# Altium PCB PCB_ECU_Standelone-V1.0_2024-03-04.pcbdoc (part 2 of 2)
Units mm, origin at the board's own origin, x right, y up, seen from the top; angles counter-clockwise.
Board outline 181.85 x 171.52 mm, 2 copper layers (Top Layer, Bottom Layer); 165 components, 147 nets, 580 pads, 706 vias.
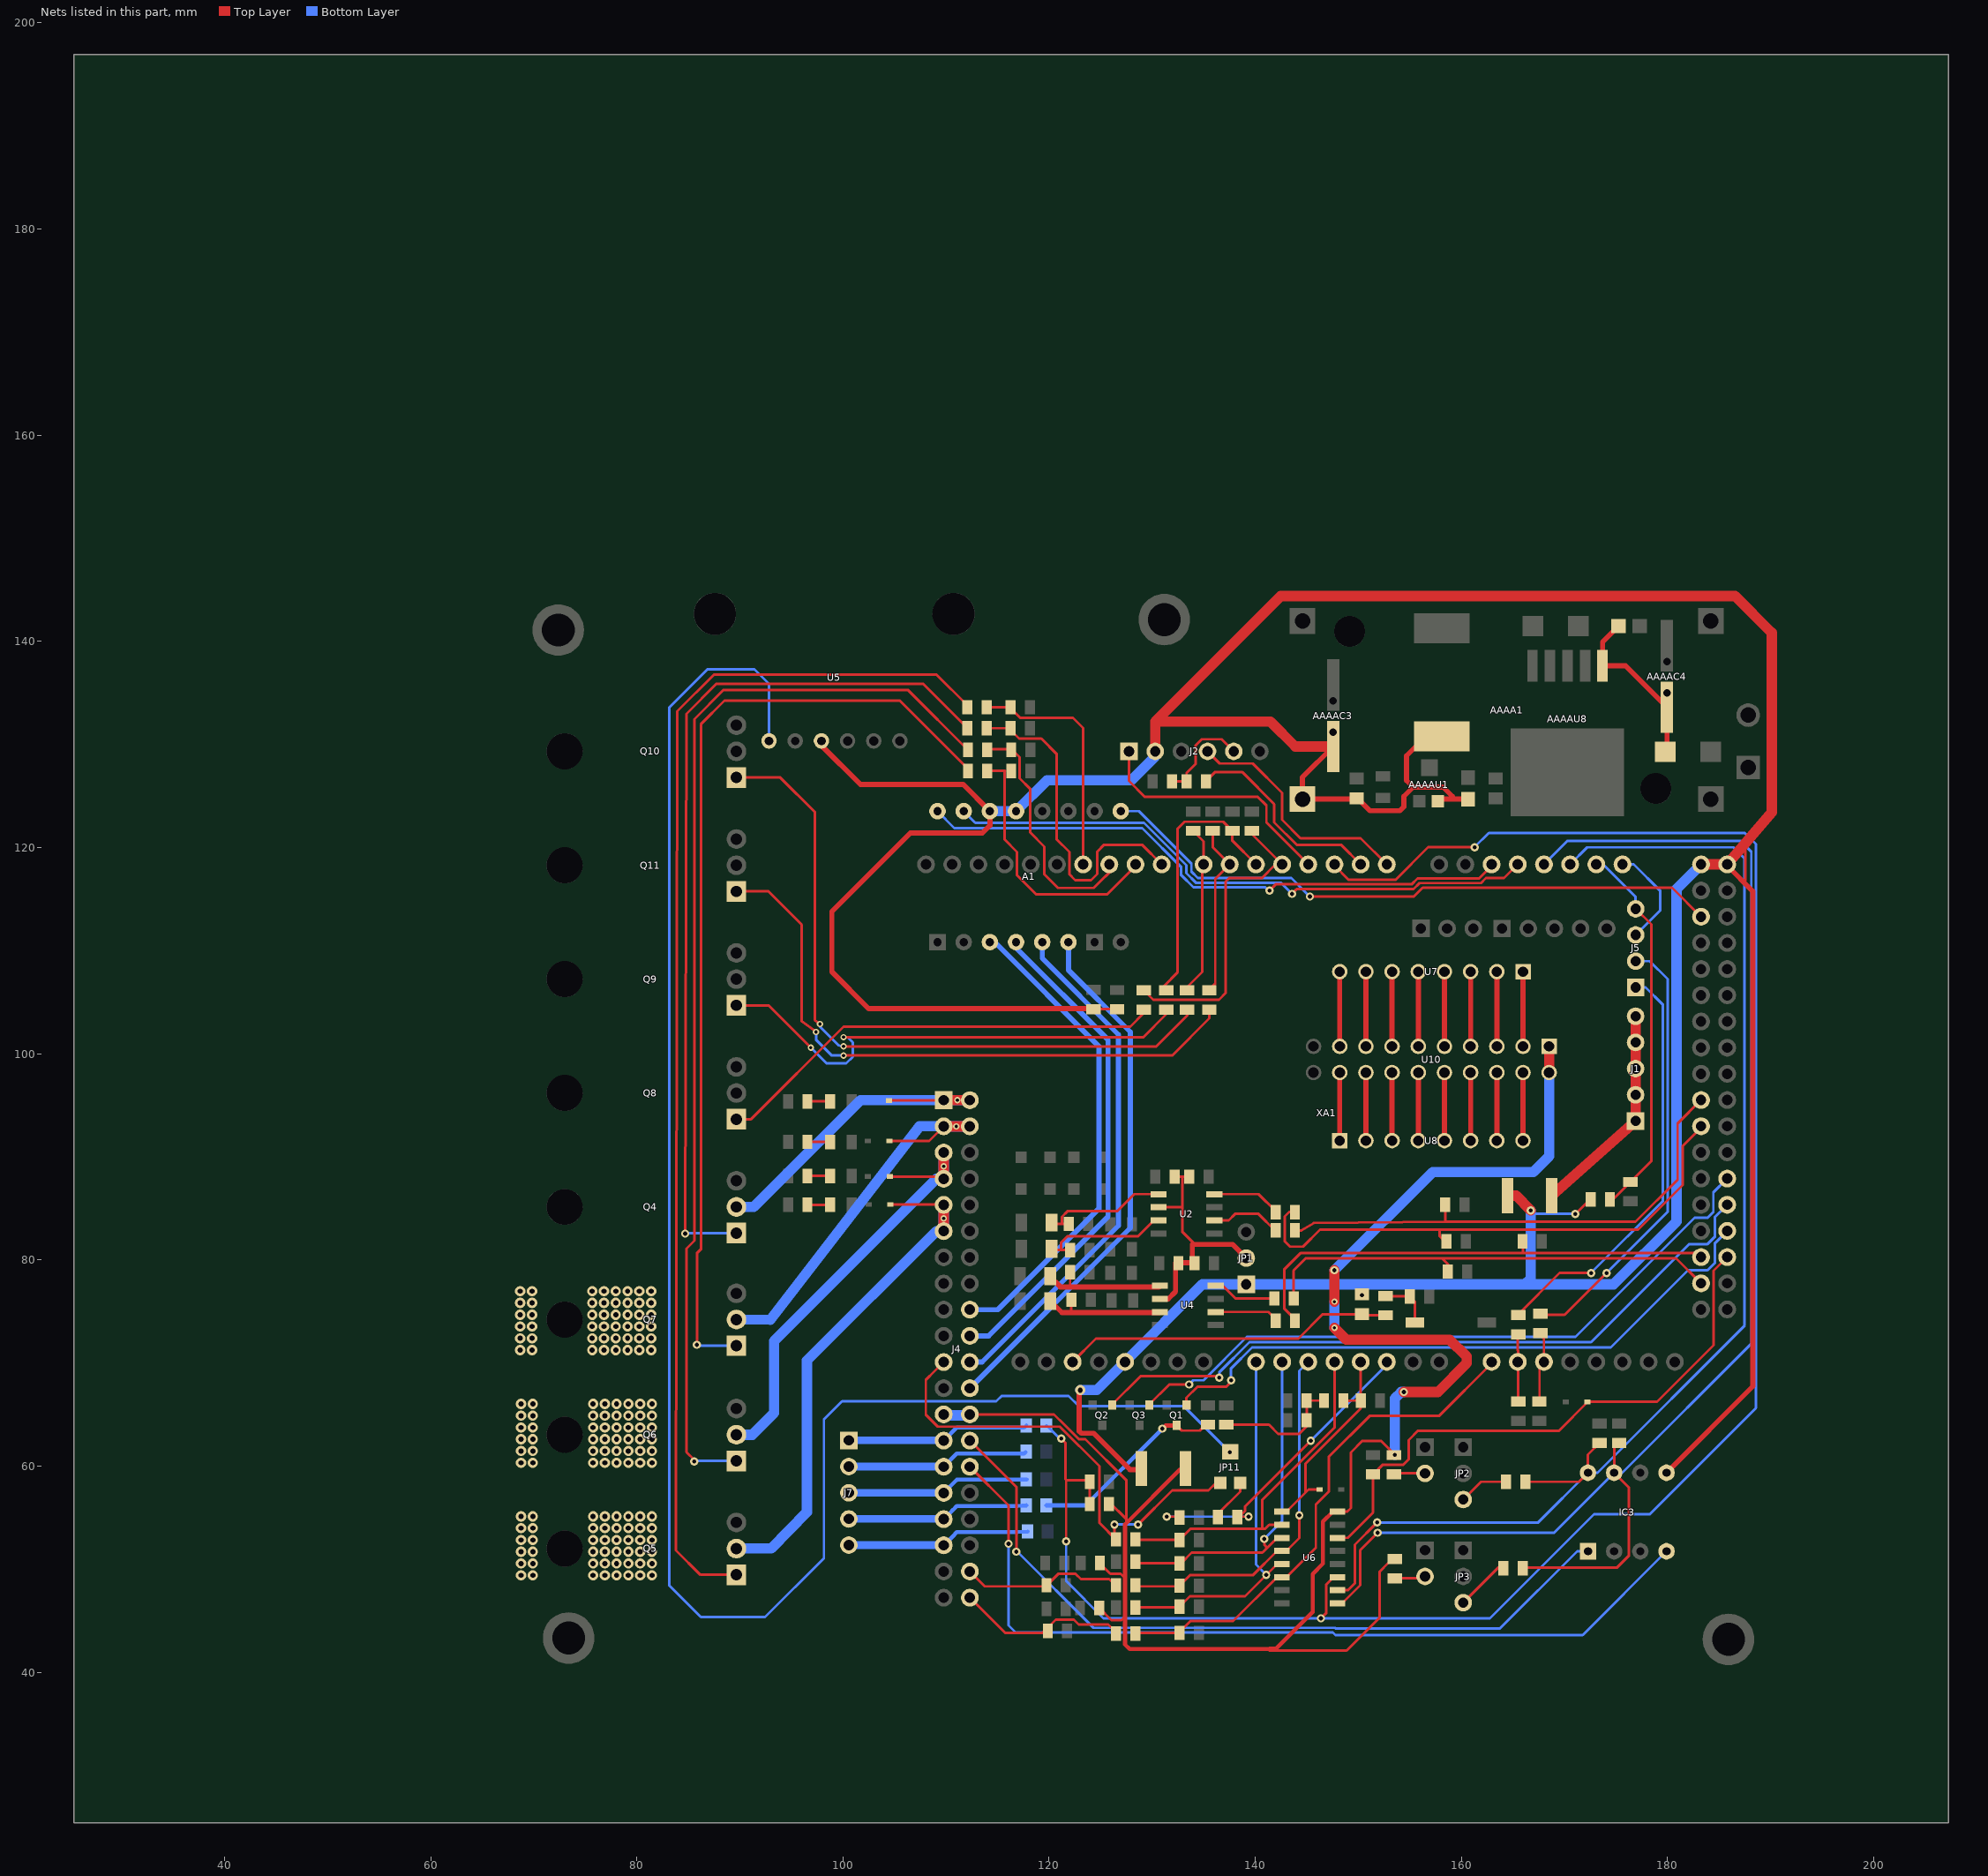
[diagram p2: the nets of this part, all layers, seen from the top]

## Via types
v1: diameter 1, hole 0.5, Top Layer to Bottom Layer, tented both sides, 458 vias
v2: diameter 0.8, hole 0.4, Top Layer to Bottom Layer, tented both sides, 130 vias
v3: diameter 0.62, hole 0.31, Top Layer to Bottom Layer, tented both sides, 118 vias

## Nets (pads, with @x,y where several pads share a name; then routed paths per layer and width w, separated by ;. In a path a pad name is that pad's centre, name@x,y a point inside that pad or via, vN(x,y) a via of type N, cw(c..) or ccw(c..) an arc to the next point about the centre after c; other vN are vias at no path point) (continued)
INJ2: 
  other v1: 68.695,71.247 69.838,71.247 75.68,71.247 76.823,71.247 77.966,71.247 79.109,71.247 80.252,71.247 81.395,71.247 68.695,72.39 69.838,72.39 75.68,72.39 76.823,72.39 77.966,72.39 79.109,72.39 80.252,72.39 81.395,72.39 68.695,73.533 69.838,73.533 75.68,73.533 76.823,73.533 77.966,73.533 79.109,73.533 80.252,73.533 81.395,73.533 68.695,74.676 69.838,74.676 75.68,74.676 76.823,74.676 77.966,74.676 79.109,74.676 80.252,74.676 81.395,74.676 68.695,75.819 69.838,75.819 75.68,75.819 76.823,75.819 77.966,75.819 79.109,75.819 80.252,75.819 81.395,75.819 68.695,76.962 69.838,76.962 75.68,76.962 76.823,76.962 77.966,76.962 79.109,76.962 80.252,76.962 81.395,76.962
INJ3: 
  other v1: 68.773,60.309 69.916,60.309 75.758,60.309 76.901,60.309 78.044,60.309 79.187,60.309 80.33,60.309 81.473,60.309 68.773,61.452 69.916,61.452 75.758,61.452 76.901,61.452 78.044,61.452 79.187,61.452 80.33,61.452 81.473,61.452 68.773,62.595 69.916,62.595 75.758,62.595 76.901,62.595 78.044,62.595 79.187,62.595 80.33,62.595 81.473,62.595 68.773,63.738 69.916,63.738 75.758,63.738 76.901,63.738 78.044,63.738 79.187,63.738 80.33,63.738 81.473,63.738 68.773,64.881 69.916,64.881 75.758,64.881 76.901,64.881 78.044,64.881 79.187,64.881 80.33,64.881 81.473,64.881 68.773,66.024 69.916,66.024 75.758,66.024 76.901,66.024 78.044,66.024 79.187,66.024 80.33,66.024 81.473,66.024
INJ4: 
  other v1: 68.773,49.396 69.916,49.396 75.758,49.396 76.901,49.396 78.044,49.396 79.187,49.396 80.33,49.396 81.473,49.396 68.773,50.539 69.916,50.539 75.758,50.539 76.901,50.539 78.044,50.539 79.187,50.539 80.33,50.539 81.473,50.539 68.773,51.682 69.916,51.682 75.758,51.682 76.901,51.682 78.044,51.682 79.187,51.682 80.33,51.682 81.473,51.682 68.773,52.825 69.916,52.825 75.758,52.825 76.901,52.825 78.044,52.825 79.187,52.825 80.33,52.825 81.473,52.825 68.773,53.968 69.916,53.968 75.758,53.968 76.901,53.968 78.044,53.968 79.187,53.968 80.33,53.968 81.473,53.968 68.773,55.111 69.916,55.111 75.758,55.111 76.901,55.111 78.044,55.111 79.187,55.111 80.33,55.111 81.473,55.111
INJ-1-OUT: D5.1 J4.1 J4.2 Q4.2 | length 37.3
  Top Layer w0.254: D5.1@104.476,95.446 104.517,95.487 J4.1@109.776,95.487 J4.2@112.316,95.487
  Top Layer w1: J4.1@109.776,95.487 J4.2@112.316,95.487
  Bottom Layer w1: Q4.2@89.67,85.133 91.344,85.133 101.697,95.486 J4.1@109.776,95.487 ; J4.1@109.776,95.487 v3(111.108,95.487) J4.2@112.316,95.487
INJ-2-OUT: D11.1 J4.3 J4.4 Q7.2 | length 42.8
  Top Layer w0.254: D11.1@104.527,91.527 108.357,91.527 J4.3@109.776,92.947 J4.4@112.316,92.947
  Top Layer w1: J4.3@109.776,92.947 J4.4@112.316,92.947
  Bottom Layer w1: Q7.2@89.67,74.211 92.952,74.168 107.43,92.964 J4.3@109.776,92.947 ; J4.3@109.776,92.947 v3(111.006,92.947) J4.4@112.316,92.947
INJ-3-OUT: D12.1 J4.5 J4.7 Q6.2 | length 47.4
  Top Layer w0.254: D12.1@104.536,88.078 109.566,88.078 J4.7@109.776,87.867 J4.5@109.776,90.407
  Top Layer w1: J4.7@109.776,87.867 J4.5@109.776,90.407
  Bottom Layer w1: Q6.2@89.67,63.035 91.217,63.035 93.333,65.151 93.333,72.136 109.063,87.866 J4.7@109.776,87.867 ; J4.7@109.776,87.867 v3(109.777,89.078) J4.5@109.776,90.407
INJ-4-OUT: D6.1 J4.9 J4.11 Q5.2 | length 54.3
  Top Layer w0.254: D6.1@104.603,85.36 109.744,85.36 J4.9@109.776,85.327 J4.11@109.776,82.787
  Top Layer w1: J4.11@109.776,82.787 J4.9@109.776,85.327
  Bottom Layer w1: Q5.2@89.67,51.986 93.048,52.014 96.508,55.527 96.508,70.231 109.063,82.786 J4.11@109.776,82.787 ; J4.11@109.776,82.787 v3(109.777,84.023) J4.9@109.776,85.327
J1_1: F1.2 J1.1 J1.2 J1.3 J1.4 J1.5 | length 21.1
  Top Layer w1: F1.2@168.749,86.233 J1.1@176.899,93.472 J1.5@176.899,103.632
J2_5: J2.5 R52.1 R53.2 | length 10
  Top Layer w0.25: R52.1@131.614,126.427 133.339,126.427 133.339,127.227 134.202,128.089 134.202,129.891 134.812,130.502 136.742,130.502 137.066,130.177 J2.5@137.917,129.327
J5_1: J5.1 R63.2 | length 41
  Top Layer w0.25: R63.2@165.476,74.664 169.539,78.727 v2(172.576,78.727)
  Bottom Layer w0.25: v2@172.576,78.727 179.555,85.706 179.555,104.742 177.864,106.433 J5.1@176.906,106.433
J5_2: J5.2 R62.1 | length 43
  Top Layer w0.25: R62.1@167.576,74.664 170.014,74.664 v2(174.077,78.727)
  Bottom Layer w0.25: v2(174.077,78.727) 180.005,84.656 180.005,107.238 178.27,108.973 J5.2@176.906,108.973
JP11_3: JP11.3 R55.2 | length 4.2
  Top Layer w0.254: R55.2@136.389,55.042 136.388,55.374 138.529,57.516 JP11.3@138.529,58.373
MAP-EXT: J4.21 JP11.1 R34.2 | length 46.1
  Top Layer w0.25: J4.21@109.776,70.087 108.913,69.223 108.045,68.356 108.045,64.979 109.206,63.818 121.036,63.818 124.877,59.977 124.877,54.489 126.539,52.827 126.343,53.024 v2(126.343,54.323) ; v2(128.629,54.323) 131.938,57.633 135.466,57.633 136.218,58.374 JP11.1@136.629,58.373
  Bottom Layer w0.25: v2(126.343,54.323) v2(128.629,54.323)
MCU-A0: C13.1 R39.1 U6.5 XA1.A0 | length 37
  Top Layer w0.25: R39.1@128.358,46.279 132.578,46.279 133.67,47.371 139.004,47.371 142.126,50.493 U6.5@142.576,50.492
  Bottom Layer w0.25: XA1.A0@140.069,70.104 140.069,50.435 v2(141.069,49.434)
MCU-A1: C14.1 R40.1 U6.3 XA1.A1 | length 34.1
  Top Layer w0.25: R40.1@128.414,50.577 132.75,50.577 132.781,50.546 133.837,51.602 140.697,51.602 141.049,51.954 ; v2(140.876,52.927) 140.876,52.361 141.049,52.189 141.049,51.954 ; U6.3@142.576,53.032 142.126,53.032 141.049,51.954
  Bottom Layer w0.25: v2(140.876,52.927) 142.609,54.659 XA1.A1@142.609,70.104
MCU-A2: C12.1 R38.1 U6.4 XA1.A2 | length 35.3
  Top Layer w0.25: R38.1@128.415,48.326 132.593,48.326 133.67,49.403 139.766,49.403 142.126,51.763 143.028,51.763 144.277,53.012 v2(144.277,55.227)
  Bottom Layer w0.25: v2(144.277,55.227) 144.277,69.232 XA1.A2@145.149,70.104
MCU-A3: C8.2 R34.1 U6.2 XA1.A3 | length 33.9
  Top Layer w0.25: R34.1@128.414,52.827 132.639,52.827 133.739,53.927 140.776,53.927 ; U6.2@142.576,54.302 141.351,54.302 140.977,53.927 140.776,53.927 ; XA1.A3@147.689,70.104 147.689,63.731 140.677,56.719 140.677,54.027 140.776,53.927
MCU-A4: C7.1 D20.1 R32.1 U6.1 XA1.A4 | length 21.1
  Top Layer w0.25: U6.1@142.576,55.572 143.027,55.572 144.876,57.422 ; D20.1@146.226,57.727 145.182,57.727 144.876,57.422 ; R32.1@148.614,66.327 149.202,66.327 149.219,66.345 C7.1@150.231,66.345 ; XA1.A4@150.229,70.104 150.229,66.345 C7.1@150.231,66.345 ; 144.876,57.422 144.876,60.227 150.231,65.581 C7.1@150.231,66.345
MCU-A5: C29.1 R55.1 XA1.A5 | length 31
  Top Layer w0.25: v2(131.423,55.085) C29.1@132.639,55.085 ; v2(139.351,55.085) 138.456,55.085 139.012,55.641 139.012,56.08 v2(145.388,62.456)
  Bottom Layer w0.25: v2(131.423,55.085) v2(139.351,55.085) ; v2(145.388,62.456) 152.769,69.836 XA1.A5@152.769,70.104
MCU-A8: C6.1 R31.1 U6.6 XA1.A8 | length 49.9
  Top Layer w0.25: R31.1@128.415,43.828 132.588,43.828 133.719,44.958 137.861,44.958 142.126,49.223 143.028,49.223 145.877,52.073 145.877,56.266 147.127,57.518 147.127,60.876 151.102,64.851 157.821,64.851 162.929,69.959 XA1.A8@162.928,70.104
MCU-A9: C23.1 R63.1 XA1.A9 | length 6.6
  Top Layer w0.25: R63.1@165.476,72.79 165.476,71.188 165.519,71.188 C23.1@165.519,66.266
MCU-A10: C22.1 R62.2 XA1.A10 | length 6.9
  Top Layer w0.25: C22.1@167.576,66.265 167.576,69.672 XA1.A10@168.008,70.104 168.009,72.358 R62.2@167.576,72.79
MCU-D0: J2.4 XA1.D0 | length 23.5
  Top Layer w0.25: J2.4@135.377,129.327 136.551,128.151 139.751,128.151 142.609,125.296 142.609,122.682 144.387,120.904 150.229,120.904 XA1.D0@152.769,118.364
MCU-D1: R53.1 XA1.D1 | length 20.1
  Top Layer w0.25: R53.1@135.215,126.426 136.114,127.328 138.725,127.328 141.847,124.206 141.847,122.428 144.006,120.269 148.324,120.269 XA1.D1@150.229,118.364
MCU-D2/FLEXSENSOR: C5.1 JP12.1 R33.2 U6.11 XA1.D2 | length 200.6
  Top Layer w0.25: v2(121.176,62.652) 121.576,62.253 ; 121.577,58.727 121.577,62.252 ; v2(121.654,52.705) 121.654,58.604 121.677,58.627 123.939,58.627 R33.2@123.939,56.527 ; v2(146.377,45.227) 146.902,45.752 146.902,48.512 147.612,49.222 U6.11@147.977,49.222 ; XA1.D2@147.689,118.364 147.689,118.234 149.046,116.877 153.627,116.877 156.776,120.027 v2(161.276,120.027)
  Bottom Layer w0.25: JP12.1@119.723,63.925 119.778,63.925 121.051,62.652 v2(121.176,62.652) ; v2(121.654,52.705) 121.654,48.849 125.276,45.227 162.776,45.227 172.875,55.326 178.278,55.326 188.572,65.623 188.572,120.33 187.49,121.412 162.662,121.412 v2(161.276,120.027)
MCU-D3: J2.1 XA1.D3 | length 24.6
  Top Layer w0.25: J2.1@127.757,129.327 127.757,126.446 129.276,124.927 140.236,124.927 141.085,124.079 141.085,122.428 XA1.D3@145.149,118.364
MCU-D4: R57.2 R61.2 XA1.D4 | length 30.2
  Top Layer w0.25: R57.2@129.07,106.271 130.115,105.227 136.479,105.227 137.138,105.885 137.138,116.688 137.476,117.027 140.636,117.027 141.973,118.364 XA1.D4@142.609,118.364 139.688,121.285 R61.2@139.688,121.617
MCU-D5: R56.2 R60.1 XA1.D5 | length 26.4
  Top Layer w0.25: R56.2@131.168,106.164 131.168,106.586 132.448,107.866 132.448,121.793 133.157,122.502 136.898,122.502 R60.1@137.783,121.617 137.783,120.65 XA1.D5@140.069,118.364
MCU-D6: R48.2 R50.2 XA1.D6 | length 17
  Top Layer w0.25: R48.2@135.487,106.164 136.122,106.799 136.122,116.957 XA1.D6@137.529,118.364 135.878,120.015 R50.2@135.878,121.617
MCU-D7: R47.2 R49.1 XA1.D7 | length 16.6
  Top Layer w0.25: R47.2@133.327,106.164 133.327,106.393 134.851,107.917 134.851,118.227 XA1.D7@134.989,118.364 134.989,120.601 R49.1@133.973,121.617
MCU-D8: R1.1 R5.2 XA1.D8 | length 32.8
  Top Layer w0.25: 117.102,130.556 119.251,130.556 120.752,129.052 120.752,120.777 121.976,119.563 121.976,117.406 122.543,116.84 124.067,116.84 124.663,117.437 124.663,119.596 125.337,120.269 129.02,120.269 XA1.D8@130.925,118.364
  Top Layer w0.254: R5.2@113.955,131.572 R1.1@116.271,131.572 116.271,131.387 117.102,130.556
MCU-D9: R15.1 R17.2 XA1.D9 | length 26
  Top Layer w0.25: R17.2@113.914,127.427 115.74,127.427 115.672,127.361 115.672,120.787 116.881,119.578 116.881,117.323 118.76,115.443 125.608,115.443 128.385,118.219 XA1.D9@128.385,118.364
MCU-D10: R16.2 R18.2 XA1.D10 | length 23.6
  Top Layer w0.25: 114.549,129.527 116.375,129.527 117.132,128.768 117.132,126.726 118.148,125.71 118.148,121.486 119.545,120.089 119.545,117.399 120.866,116.078 124.338,116.078 XA1.D10@126.487,118.227
MCU-D11: R2.2 R6.2 XA1.D11 | length 23.5
  Top Layer w0.25: R2.2@116.271,133.604 116.271,133.515 117.198,132.588 122.316,132.588 123.305,131.6 XA1.D11@123.305,118.364
  Top Layer w0.254: R6.2@113.955,133.604 R2.2@116.271,133.604
MCU-D16: A1.16 XA1.D16 | length 58.5
  Top Layer w0.25: v2(141.377,115.827) 141.977,116.427 155.171,116.427 155.747,117.003 161.713,117.003 162.929,118.219 XA1.D16@162.928,118.364
  Bottom Layer w0.25: A1.16@109.177,123.527 110.817,121.887 129.032,121.887 132.82,118.099 132.82,117.315 133.996,116.138 140.965,116.138 141.277,115.827 v2(141.377,115.827)
MCU-D17: A1.15 XA1.D17 | length 58.7
  Top Layer w0.25: v2(143.555,115.502) 143.955,115.902 144.03,115.977 155.358,115.977 155.934,116.553 161.899,116.553 162.384,117.038 164.143,117.038 XA1.D17@165.468,118.364
  Bottom Layer w0.25: A1.15@111.717,123.527 112.841,122.402 129.202,122.402 133.328,118.276 133.328,117.5 134.24,116.588 142.469,116.588 143.155,115.902 v2(143.555,115.502)
MCU-D18: C16.2 IC3.7 R44.1 U6.9 XA1.D18 | length 144.3
  Top Layer w0.25: U6.9@147.977,46.682 148.427,46.682 150.176,48.432 150.176,51.827 v2(151.876,53.527) ; R44.1@166.014,50.127 175.077,50.127 176.231,51.282 176.231,57.932 175.617,58.547 IC3.7@174.816,59.347 174.816,61.904 C16.2@175.239,62.327
  Bottom Layer w0.25: v2(151.876,53.527) 168.997,53.528 IC3.7@174.816,59.347 175.595,59.347 188.123,71.872 188.123,119.581 187.053,120.65 170.295,120.65 XA1.D18@168.008,118.364
MCU-D19: C15.2 IC3.8 R43.1 U6.10 XA1.D19 | length 125.6
  Top Layer w0.25: U6.10@147.977,47.952 149.001,47.952 149.677,48.627 149.677,52.373 v2(151.829,54.526) ; R43.1@166.204,58.471 171.4,58.471 IC3.8@172.276,59.347 172.276,61.09 C15.2@173.514,62.327
  Bottom Layer w0.25: v2(151.829,54.526) 167.455,54.526 IC3.8@172.276,59.347 173.198,59.347 187.475,73.627 187.475,118.928 186.388,120.015 172.2,120.015 XA1.D19@170.548,118.364
MCU-D20/VSS: C28.2 J5.4 R54.1 XA1.D20 | length 36.9
  Top Layer w0.25: R54.1@174.407,85.852 174.691,85.852 178.423,89.583 178.423,112.537 J5.4@176.906,114.053
  Bottom Layer w0.25: XA1.D20@173.088,118.364 173.739,118.364 176.906,115.197 J5.4@176.906,114.053
MCU-D21: J5.3 XA1.D21 | length 10
  Bottom Layer w0.25: XA1.D21@175.628,118.364 176.72,118.364 179.301,115.783 179.301,113.908 J5.3@176.906,111.513
MCU-D24: A1.9 XA1.D24 | length 61.7
  Top Layer w0.25: v2(145.3,115.24) 145.866,115.24 155.382,115.24 156.245,116.103 180.43,116.103 XA1.D24@183.248,113.284
  Bottom Layer w0.25: A1.9@126.957,123.527 128.713,123.527 133.808,118.432 133.808,117.656 134.426,117.038 143.502,117.038 144.9,115.64 v2(145.3,115.24)
MCU-D38: R3.1 R7.2 XA1.D38 | length 49.5
  Top Layer w0.25: R7.2@143.851,82.855 144.48,82.855 145.657,83.566 158.626,83.693 ; R3.1@158.435,85.344 158.435,83.693 176.899,83.693 180.975,87.77 180.975,93.231 XA1.D38@183.248,95.504
MCU-D40: R4.2 R8.2 XA1.D40 | length 53.5
  Top Layer w0.25: R8.2@143.851,84.633 143.282,84.633 142.863,84.214 142.863,81.788 143.371,81.28 144.641,81.28 146.292,82.931 157.876,82.931 ; 157.876,82.326 157.876,82.931 ; R4.2@158.562,81.788 158.377,81.788 157.876,82.288 157.876,82.931 ; XA1.D40@183.248,92.964 183.248,92.819 181.476,91.046 181.476,87.254 177.152,82.931 157.876,82.931
MCU-D45: Q3.1 XA1.D45 | length 66.3
  Top Layer w0.25: Q3.1@129.727,65.927 129.727,65.977 131.662,67.912 133.015,67.912 v2(133.581,67.912)
  Bottom Layer w0.25: v2(133.581,67.912) 133.98,68.313 134.976,68.313 139.18,72.517 171.057,72.517 182.614,84.074 183.884,84.074 184.445,84.635 184.445,86.54 XA1.D45@185.788,87.884
MCU-D47: Q2.1 XA1.D47 | length 69.3
  Top Layer w0.25: Q2.1@126.126,65.926 126.126,65.977 128.857,68.707 136.513,68.707 v2(136.513,68.58)
  Bottom Layer w0.25: v2(136.513,68.58) 136.513,69.088 139.434,72.009 172.58,72.009 182.105,81.534 183.883,81.534 184.608,82.259 184.608,84.163 XA1.D47@185.788,85.344
MCU-D49: Q1.1 XA1.D49 | length 61.7
  Top Layer w0.25: Q1.1@133.327,65.927 133.327,66.627 134.402,67.703 137.192,67.703 137.656,68.166 v2(137.656,68.326)
  Bottom Layer w0.25: v2(137.656,68.326) 137.656,69.469 139.687,71.501 174.485,71.501 181.978,78.994 183.883,78.994 184.608,79.719 184.608,81.623 XA1.D49@185.788,82.804
MCU-D50: R19.1 R21.2 XA1.D50 | length 48
  Top Layer w0.25: R21.2@143.863,74.226 142.802,75.291 142.802,79.06 144.387,80.645 165.977,80.645 R19.1@165.928,81.788 ; 165.877,80.645 183.249,80.645 XA1.D50@183.248,80.264
MCU-D51: D13.1 R37.2 U6.14 XA1.D51 | length 56.6
  Top Layer w0.25: U6.14@147.977,53.032 148.976,53.033 151.422,55.479 R37.2@151.422,59.184 152.339,60.101 154.323,60.101 154.877,60.655 154.877,62.512 155.791,63.426 169.477,63.426 172.276,66.228 178.976,66.228 184.475,71.727 184.475,78.951 XA1.D51@185.788,80.264
MCU-D52: R20.2 R22.2 XA1.D52 | length 45.2
  Top Layer w0.25: R22.2@143.724,76.251 143.724,78.966 144.895,80.137 180.836,80.137 XA1.D52@183.248,77.724 ; 158.123,80.137 158.689,79.571 R20.2@158.689,78.867
O2_SENSOR: C3.1 J4.40 R31.2 | length 16.7
  Top Layer w0.25: J4.40@112.316,47.227 115.718,43.828 119.38,43.828 120.638,45.085 122.416,45.085 122.873,44.628 125.738,44.628 R31.2@126.538,43.828
PROTO-1: J4.27 J7.1 JP12.2 | length 17.8
  Bottom Layer w0.4: J4.27@109.776,62.467 111.04,63.731 117.595,63.731 JP12.2@117.79,63.925
  Bottom Layer w0.75: J7.1@100.571,62.484 109.759,62.484 J4.27@109.776,62.467
PROTO-2: J4.29 J7.2 JP6.2 | length 17.7
  Bottom Layer w0.4: J4.29@109.776,59.927 111.054,61.204 117.579,61.204 JP6.2@117.717,61.341
  Bottom Layer w0.75: J7.2@100.571,59.944 109.759,59.944 J4.29@109.776,59.927
PROTO-3: J4.31 J7.3 JP7.2 | length 17.8
  Bottom Layer w0.4: J4.31@109.776,57.387 111.054,58.664 JP7.2@117.844,58.674
  Bottom Layer w0.75: J7.3@100.571,57.404 109.759,57.404 J4.31@109.776,57.387
PROTO-4: J4.33 J7.4 JP8.2 | length 17.8
  Bottom Layer w0.4: J4.33@109.776,54.847 110.64,55.711 111.053,56.123 116.923,56.123 JP8.2@117.79,56.178
  Bottom Layer w0.75: J7.4@100.571,54.864 109.759,54.864 J4.33@109.776,54.847
PROTO-5: J4.35 J7.5 JP9.2 | length 17.9
  Bottom Layer w0.4: J4.35@109.776,52.307 110.64,53.17 111.054,53.584 116.955,53.594 JP9.2@117.917,53.638
  Bottom Layer w0.75: J7.5@100.571,52.324 109.759,52.324 J4.35@109.776,52.307
R5_1: Q4.1 R5.1 | length 85.7
  Top Layer w0.254: v2(84.697,82.55) 84.824,132.969 87.745,135.89 107.762,135.89 R5.1@112.08,131.572
  Bottom Layer w0.254: v2(84.697,82.55) 84.74,82.593 Q4.1@89.67,82.593
R6_1: Q5.1 R6.1 | length 119.3
  Top Layer w0.254: Q5.1@89.67,49.446 86.177,49.446 83.808,51.816 83.935,133.223 87.491,136.779 109.081,136.779 112.08,133.779 R6.1@112.08,133.604
R9_1: D3.2 R9.1 | length 2.2
  Top Layer w0.254: R9.1@96.556,95.377 D3.2@98.76,95.376
R10_1: D4.2 R10.1 | length 2.2
  Top Layer w0.254: R10.1@96.556,85.344 D4.2@98.76,85.343
R17_1: Q7.1 R17.1 | length 94
  Top Layer w0.254: v2(85.84,71.755) 85.84,80.645 86.221,81.026 86.221,131.953 88.507,134.239 105.525,134.239 112.131,127.632 R17.1@112.131,127.432
  Bottom Layer w0.254: v2(85.84,71.755) 85.923,71.671 Q7.1@89.67,71.671
R18_1: Q6.1 R18.1 | length 106.7
  Top Layer w0.254: v2@85.586,60.579 84.824,61.341 84.824,81.09 85.586,81.852 85.586,132.461 88.38,135.255 106.34,135.255 R18.1@112.131,129.464
  Bottom Layer w0.254: v2(85.586,60.452) 85.629,60.495 Q6.1@89.67,60.495
R21_1: R21.1 U4.2 | length 6.1
  Top Layer w0.25: U4.2@136.163,74.944 141.272,74.944 R21.1@141.989,74.227
R22_1: R22.1 U4.4 | length 6.2
  Top Layer w0.25: U4.4@136.163,77.484 136.849,77.484 138.083,76.251 R22.1@141.849,76.251
R23_1: D7.2 R23.1 | length 2.2
  Top Layer w0.254: R23.1@96.556,91.44 D7.2@98.76,91.439
R24_1: D8.2 R24.1 | length 2.2
  Top Layer w0.254: R24.1@96.556,88.138 D8.2@98.76,88.137
R25_1: R25.1 R27.2 U4.7 | length 12.5
  Top Layer w0.25: R25.1@122.164,76.124 122.164,75.09 122.377,74.877
  Top Layer w0.5: R27.2@120.089,76.027 121.239,74.877 130.696,74.877 U4.7@130.763,74.944
R26_1: R26.1 R28.2 U4.5 | length 12.6
  Top Layer w0.25: R26.1@122.037,78.791 122.037,77.467 122.126,77.377
  Top Layer w0.5: R28.2@120.089,78.377 121.09,77.376 130.655,77.376 U4.5@130.763,77.484
R32_2: C4.1 R29.2 R30.1 R32.2 | length 12.6
  Top Layer w0.254: R30.1@137.198,64.01 141.336,64.01 142.228,63.119 144.26,63.119 144.994,63.853 R29.2@144.994,64.44 C4.1@144.994,66.345 R32.2@146.676,66.345
R41_1: JP4.2 R41.1 | length 3
  Top Layer w0.25: R41.1@153.476,59.289 156.474,59.289 JP4.2@156.476,59.287
R42_1: JP5.2 R42.1 | length 3
  Top Layer w0.25: R42.1@153.531,49.1 156.29,49.1 JP5.2@156.476,49.287
R43_2: JP2.3 R43.2 | length 4.9
  Top Layer w0.25: JP2.3@160.176,56.747 161.9,58.471 R43.2@164.329,58.471
R44_2: JP3.3 R44.2 | length 5.4
  Top Layer w0.25: JP3.3@160.176,46.747 163.556,50.127 R44.2@164.139,50.127
R46_2: C17.2 R46.2 SW3.2 | length 5.1
  Top Layer w0.254: R46.2@152.642,76.503 152.69,76.454 C17.2@155.006,76.454 155.499,75.961 SW3.2@155.499,73.914
R47_1: Q10.1 R47.1 | length 68.3
  Top Layer w0.254: Q10.1@89.67,126.789 93.924,126.789 97.27,123.444 97.27,103.251 v3(97.778,102.87) ; v3(100.064,100.711) 130.417,100.711 133.388,103.683 R47.1@133.388,104.269
  Bottom Layer w0.254: v3(97.778,102.87) 97.778,102.616 99.556,100.838 99.911,100.66 v3(100.064,100.711)
R48_1: Q11.1 R48.1 | length 60.7
  Top Layer w0.254: Q11.1@89.67,115.74 92.781,115.74 96,112.522 96,103.144 v3(97.397,102.108) ; v3(100.064,99.822) 131.941,99.822 135.547,103.429 R48.1@135.547,104.269
  Bottom Layer w0.254: v3(97.397,102.108) 97.397,101.346 98.921,99.822 v3(100.064,99.822)
R56_1: Q9.1 R56.1 | length 49
  Top Layer w0.254: Q9.1@89.67,104.691 92.781,104.691 v3(96.889,100.584) ; v3(100.064,101.6) 129.147,101.6 131.356,103.81 R56.1@131.356,104.269
  Bottom Layer w0.254: v3(96.889,100.584) 98.413,99.06 100.318,99.06 100.953,99.695 100.953,101.092 100.445,101.6 v3(100.064,101.6)
R57_1: Q8.1 R57.1 | length 44.1
  Top Layer w0.254: Q8.1@89.67,93.642 91.09,93.642 100.064,102.616 127.877,102.616 129.197,103.937 R57.1@129.197,104.269
RESET: R46.1 R59.2 XA1.RST1 | length 32.3
  Top Layer w0.25: XA1.RST1@122.289,70.104 124.541,72.354 144.183,72.354 146.555,74.726 R59.2@150.356,74.726
  Top Layer w0.254: R59.2@150.356,74.726 150.454,74.627 R46.1@152.642,74.628
STEP-A1: A1.4 J4.20 | length 48.5
  Bottom Layer w0.5: J4.20@112.316,72.627 114.143,72.626 125.718,84.201 125.718,101.346 116.797,110.266 A1.4@116.797,110.827
STEP-A2: A1.3 J4.18 | length 47.1
  Bottom Layer w0.5: J4.18@112.316,75.167 115.032,75.166 124.829,84.963 124.829,100.711 114.712,110.828 A1.3@114.257,110.827
STEP-B1: A1.5 J4.22 | length 50.5
  Bottom Layer w0.5: J4.22@112.316,70.087 113.508,70.086 126.734,83.312 126.734,101.854 119.337,109.25 A1.5@119.337,110.827
STEP-B2: A1.6 J4.24 | length 52.2
  Bottom Layer w0.5: J4.24@112.316,67.547 127.877,83.106 127.877,102.108 121.877,108.107 A1.6@121.877,110.827
TACHO-OUT: JP8.1 Q1.3 R51.1 | length 19.1
  Top Layer w0.25: Q1.3@132.377,63.927 132.87,63.433 134.62,63.433 R51.1@135.176,63.989
  Top Layer w0.4: v2(130.99,63.627) 131.289,63.927 Q1.3@132.377,63.927
  Bottom Layer w0.4: JP8.1@119.723,56.178 123.541,56.178 130.589,63.227 v2(130.99,63.627)
TPS_SENSOR: C9.1 J4.38 R38.2 | length 15.8
  Top Layer w0.25: J4.38@112.316,49.767 113.757,48.326 119.677,48.326 120.879,49.53 122.573,49.53 123.076,49.027 125.839,49.027 R38.2@126.538,48.326
U2_2: R7.1 U2.2 | length 6.9
  Top Layer w0.254: U2.2@136.035,83.835 137.417,83.835 138.037,84.455 140.323,84.455 141.923,82.855 R7.1@141.976,82.855
U2_4: R8.1 U2.4 | length 6.7
  Top Layer w0.254: U2.4@136.036,86.374 140.323,86.374 141.976,84.721 R8.1@141.976,84.633
U2_5: R12.1 R14.2 U2.5 | length 12.7
  Top Layer w0.254: R14.2@120.246,83.617 120.373,83.49 R12.1@121.91,83.49 ; 121.25,83.49 121.25,84.178 121.781,84.709 126.607,84.709 128.273,86.375 U2.5@130.636,86.374
U2_7: R11.1 R13.2 U2.7 | length 12.9
  Top Layer w0.254: R13.2@120.246,81.077 120.373,80.95 R11.1@122.037,80.95 ; 121.173,80.95 121.173,81.689 121.781,82.296 128.639,82.296 130.178,83.835 U2.7@130.636,83.834
U5_1: JP11.2 U5.1 | length 177.2
  Top Layer w0.254: v2(137.529,61.341) 137.549,61.362 JP11.2@137.579,61.361
  Bottom Layer w0.25: U5.1@92.832,130.339 92.832,135.882 91.428,137.287 86.856,137.287 83.173,133.604 83.173,48.387 86.221,45.339 92.444,45.339 98.159,51.054 98.159,64.516 99.919,66.276 114.872,66.276 115.397,66.802 121.887,66.802 122.863,65.827 133.043,65.827 v2(137.529,61.341)
U7_1: U7.1 U10.3 | length 7.2
  Top Layer w0.5: U10.3@165.977,100.711 U7.1@165.977,107.95
U7_2: U7.2 U10.5 | length 7.2
  Top Layer w0.5: U10.5@163.437,100.711 U7.2@163.437,107.95
U7_3: U7.3 U10.7 | length 7.2
  Top Layer w0.5: U10.7@160.897,100.711 U7.3@160.897,107.95
U7_4: U7.4 U10.9 | length 7.2
  Top Layer w0.5: U10.9@158.357,100.711 U7.4@158.357,107.95
U7_5: U7.5 U10.11 | length 7.2
  Top Layer w0.5: U10.11@155.817,100.711 U7.5@155.817,107.95
U7_6: U7.6 U10.13 | length 7.2
  Top Layer w0.5: U10.13@153.277,100.711 U7.6@153.277,107.95
U7_7: U7.7 U10.15 | length 7.2
  Top Layer w0.5: U10.15@150.737,100.711 U7.7@150.737,107.95
U7_8: U7.8 U10.17 | length 7.2
  Top Layer w0.5: U10.17@148.197,100.711 U7.8@148.197,107.95
U8_1: U8.1 U10.18 | length 6.6
  Top Layer w0.5: U8.1@148.197,91.567 U10.18@148.197,98.171
U8_2: U8.2 U10.16 | length 6.6
  Top Layer w0.5: U8.2@150.737,91.567 U10.16@150.737,98.171
U8_3: U8.3 U10.14 | length 6.6
  Top Layer w0.5: U8.3@153.277,91.567 U10.14@153.277,98.171
U8_4: U8.4 U10.12 | length 6.6
  Top Layer w0.5: U8.4@155.817,91.567 U10.12@155.817,98.171
U8_5: U8.5 U10.10 | length 6.6
  Top Layer w0.5: U8.5@158.357,91.567 U10.10@158.357,98.171
U8_6: U8.6 U10.8 | length 6.6
  Top Layer w0.5: U8.6@160.897,91.567 U10.8@160.897,98.171
U8_7: U8.7 U10.6 | length 6.6
  Top Layer w0.5: U8.7@163.437,91.567 U10.6@163.437,98.171
U8_8: U8.8 U10.4 | length 6.6
  Top Layer w0.5: U8.8@165.977,91.567 U10.4@165.977,98.171
VDD: A1.13 A1.14 AAAA1.OUT+ AAAAC3.1 AAAAC5.2 AAAAL2.2 AAAAR13.2 AAAAU1.3 C1.2 C2.2 F1.1 F2.1 IC3.5 J2.2 JP1.1 R54.2 R59.1 U5.3 XA1.5V1 XA1.5V3 XA1.5V4 | length 442
  Top Layer w0.25: C2.2@124.692,104.312 C1.2@126.851,104.312 ; v2(171.057,84.455) 172.454,85.852 R54.2@172.532,85.852 ; 187.386,116.637 187.556,116.807 187.556,120.871
  Top Layer w0.5: U5.3@97.912,130.339 97.912,129.914 101.715,126.111 111.672,126.111 A1.14@114.257,123.527 ; A1.14@114.257,123.527 114.257,122.144 113.526,121.412 106.541,121.412 98.921,113.792 98.921,107.95 102.51,104.361 124.643,104.361 C2.2@124.691,104.313 ; v1(123.029,67.361) 122.927,67.258 122.927,63.377 123.126,63.177 124.327,63.177 127.847,59.657 F2.1@129.031,59.657 ; AAAAC3.1@147.561,129.794 144.579,126.812 AAAA1.OUT+@144.58,124.697 149.781,124.697 AAAAR13.2@149.848,124.764 149.925,124.764 151.118,123.571 154.039,123.571 154.42,123.952 154.42,124.968 155.309,125.857 ; AAAAU1.3@157.733,124.486 157.947,124.7 AAAAC5.2@160.643,124.7 ; AAAAL2.2@158.103,130.767 156.536,130.767 154.674,128.905 154.674,126.492 155.309,125.857 ; 159.128,124.7 159.128,124.959 158.23,125.857 155.309,125.857 ; IC3.5@179.896,59.347 188.276,67.727 188.276,115.747 185.789,118.235 XA1.5V4@185.788,118.364
  Top Layer w1: J2.2@130.297,129.327 130.297,132.215 ; AAAAC3.1@147.561,129.794 143.886,129.794 141.466,132.215 130.297,132.215 ; F1.1@164.474,86.233 165.299,86.233 v2(166.729,84.803) ; XA1.5V3@183.248,118.364 XA1.5V4@185.788,118.364 190.107,123.421 190.107,140.843 186.551,144.399 142.482,144.399 130.297,132.215
  Bottom Layer w0.25: 166.729,84.237 166.946,84.455 v2(171.057,84.455)
  Bottom Layer w0.4: AAAA1.OUT+@143.989,124.697 AAAA1.OUT+@144.58,124.697 ; 149.929,77.681 150.229,77.381 v2@150.229,76.581
  Bottom Layer w1: A1.14@114.257,123.527 A1.13@116.797,123.527 119.797,126.527 127.977,126.527 130.297,128.847 J2.2@130.297,129.327 ; v1(123.029,67.361) 123.736,67.361 124.626,67.361 XA1.5V1@127.369,70.104 134.892,77.627 JP1.1@139.126,77.627 JP1.1@139.126,77.852 ; 137.377,77.627 152.277,77.627 166.176,77.627 ; v2(166.729,84.803) 166.729,84.237 166.729,78.179 166.176,77.627 ; XA1.5V3@183.248,118.364 180.876,115.992 180.876,83.727 174.776,77.627 166.176,77.627
  other v2: 150.356,76.581
VDDA: F2.2 J4.25 J4.26 R33.1 R35.2 R36.2 R41.2 R42.2 U6.16 U10.1 U10.2 | length 190.6
  Top Layer w0.25: J4.26@112.316,65.007 113.538,65.007 120.483,65.007 121.478,64.012 122.888,62.602 123.507,62.602 127.51,58.599 127.51,54.493 127.51,54.831 R33.1@125.814,56.527 ; R35.2@124.877,46.228 126.053,45.052 127.018,45.052 127.351,45.385 ; R36.2@124.914,50.577 125.939,49.552 126.952,49.552 127.351,49.152 127.351,45.385 ; 127.351,43.385 127.351,45.385 ; 141.858,42.109 148.87,42.109 152.077,45.316 152.077,49.764 152.92,50.608 R42.2@153.476,51.164 ; U6.16@147.977,55.572 148.921,55.572 149.277,55.927 149.277,61.327 150.377,62.427 152.214,62.427 R41.2@153.476,61.164
  Top Layer w0.4: F2.2@133.307,59.657 132.692,59.657 127.369,54.333 127.369,42.672 127.805,42.235 141.986,42.235 145.575,45.827 145.575,49.527 146.576,50.528 146.576,54.623 147.526,55.573 U6.16@147.977,55.572
  Top Layer w0.5: 141.433,42.236 141.985,42.236
  Top Layer w1: v3(147.689,73.406) 148.831,72.263 158.864,72.263 160.515,70.612 160.515,69.977 157.721,67.183 v2(154.42,67.183) ; v3(147.689,75.946) v2(147.689,78.994) ; U10.2@168.517,98.171 U10.1@168.517,100.711
  Bottom Layer w1: J4.25@109.776,65.007 109.877,64.907 112.217,64.907 J4.26@112.316,65.007 ; v3(147.689,73.406) v3(147.689,75.946) ; v2(147.689,78.994) 157.214,88.519 166.992,88.519 168.516,90.043 U10.2@168.517,98.171 ; v2(153.531,61.087) 153.531,66.548 154.166,67.183 v2(154.42,67.183)
VDRIVE: C24.2 C25.2 C26.2 C27.2 JP1.2 U2.6 U4.6 | length 24.4
  Top Layer w0.254: U2.6@130.636,85.104 132.92,85.104 ; C26.2@132.167,88.062 C27.2@133.594,88.062 ; 132.92,88.062 132.92,82.734 134.027,81.627
  Top Layer w0.5: U4.6@130.763,76.214 131.554,76.214 132.264,76.924 132.264,79.727 133.889,79.727 133.889,81.489 137.804,81.489 JP1.2@139.126,80.167
VR1-: IC3.1 J4.28 | length 74.3
  Top Layer w0.25: J4.28@112.316,62.467 116.828,57.956 v2(116.828,51.689)
  Bottom Layer w0.25: v2(116.828,51.689) 116.914,51.689 124.302,44.301 147.717,44.301 147.791,44.227 163.727,44.227 171.226,51.727 IC3.1@172.276,51.727
VR2-: IC3.4 J4.30 | length 84.5
  Top Layer w0.25: J4.30@112.316,59.927 116.066,56.178 v2(116.066,52.451)
  Bottom Layer w0.25: v2(116.066,52.451) 116.077,52.451 116.077,44.527 116.753,43.851 147.53,43.851 147.784,43.597 171.766,43.597 IC3.4@179.896,51.727
VREGIN: AAAAC4.1 AAAAC6.2 AAAAD1.1 AAAAU8.1 | length 17
  Top Layer w0.5: AAAAC6.2@175.234,141.478 173.695,139.939 AAAAU8.1@173.694,137.621 175.93,137.621 AAAAC4.1@179.946,133.604 179.947,129.841 AAAAD1.1@179.392,129.286
pads on no net: A1.2 A1.10 A1.11 A1.12 AAAA1. J2.6 Q4. Q5. Q6. Q7. Q8. Q9. Q10. Q11. U2.1 U2.8 U4.1 U4.8 U5. U5.4 U5.5 U5.6 U6.7 U6.12 U6.13 U6.15 XA1. XA1.3V3 XA1.A6 XA1.A7 XA1.A11 XA1.A12 XA1.A13 XA1.A14 XA1.A15 XA1.AREF XA1.D12 XA1.D13 XA1.D14 XA1.D15 XA1.D22 XA1.D23 XA1.D25 XA1.D26 XA1.D27 XA1.D28 XA1.D29 XA1.D30 XA1.D31 XA1.D32 XA1.D33 XA1.D34 XA1.D35 XA1.D36 XA1.D37 XA1.D39 XA1.D41 XA1.D42 XA1.D43 XA1.D44 XA1.D46 XA1.D48 XA1.D53 XA1.IORF XA1.SCL XA1.SDA XA1.VIN
copper on no net:
  other v2: 185.916,41.148 73.394,41.275 187.313,41.656 74.791,41.783 184.392,41.783 71.87,41.91 183.884,43.18 71.362,43.307 187.948,43.307 75.426,43.434 184.392,44.577 71.87,44.704 187.313,44.704 74.791,44.831 185.916,45.212 73.394,45.339 72.378,139.065 73.775,139.573 70.854,139.7 131.179,140.081 132.576,140.589 129.655,140.716 70.346,141.097 74.41,141.224 129.147,142.113 133.211,142.24 70.854,142.494 73.775,142.621 72.378,143.129 129.655,143.51 132.576,143.637 131.179,144.145

## Polygon pours and split planes (outlines as drawn)
GND on Bottom Layer (solid): 66.917,145.796 191.377,145.796 191.377,38.227 66.917,38.227
GND on Top Layer (solid): 66.917,145.796 191.377,145.796 191.377,38.227 66.917,38.227

## Other copper
Top Layer:
  region net INJ4: 67.933,56.007 82.157,56.007 82.157,48.387 67.933,48.387
  region net INJ3: 67.933,67.056 82.157,67.056 82.157,59.436 67.933,59.436
  region net INJ2: 67.933,77.851 82.157,77.851 82.157,70.231 67.933,70.231
  region net INJ1: 67.933,88.9 82.157,88.9 82.157,81.28 67.933,81.28
  region net HC2: 67.933,100.076 82.157,100.076 82.157,92.456 67.933,92.456
  region net IDEL: 67.933,110.998 82.157,110.998 82.157,103.378 67.933,103.378
  region net HC1: 67.933,121.92 82.157,121.92 82.157,114.3 67.933,114.3
  region net BOOST: 67.933,132.969 82.157,132.969 82.157,125.349 67.933,125.349
Bottom Layer:
  region net BOOST: 67.933,132.969 82.157,132.969 82.157,125.349 67.933,125.349
  region net HC1: 67.933,121.92 82.157,121.92 82.157,114.3 67.933,114.3
  region net IDEL: 67.933,110.998 82.157,110.998 82.157,103.378 67.933,103.378
  region net HC2: 67.933,100.076 82.157,100.076 82.157,92.456 67.933,92.456
  region net INJ1: 67.933,88.9 82.157,88.9 82.157,81.28 67.933,81.28
  region net INJ2: 67.933,77.851 82.157,77.851 82.157,70.231 67.933,70.231
  region net INJ4: 67.933,56.007 82.157,56.007 82.157,48.387 67.933,48.387
  region net INJ3: 67.933,67.056 82.157,67.056 82.157,59.436 67.933,59.436

## Silkscreen, mask and mechanical layers (free items; w line width, h text height)
Top Overlay:
  lines w0.12: 102.721,52.291 105.769,52.291 ; 102.721,54.831 105.769,54.831 ; 102.721,57.371 105.769,57.371 ; 102.721,59.911 105.769,59.911 ; 102.721,62.451 105.769,62.451 ; 105.927,70.027 105.927,72.727 ; 105.977,70.027 105.977,72.727 ; 106.027,70.027 106.027,72.727 ; 106.077,70.027 106.077,72.727 106.177,72.727 106.177,70.027 106.277,70.027 106.277,72.727 ; 106.377,70.027 105.877,70.027 105.877,72.727 106.377,72.727 ; 127.152,90.627 137.651,90.627 137.651,96.487 127.152,96.487 127.152,86.627 126.052,85.527 ; 150.526,65.227 150.526,42.227 163.526,42.227 163.526,66.977 154.027,66.977 ; 152.776,54.227 154.277,52.727 ; 154.677,56.127 155.576,57.027 ; 157.882,113.792 157.982,113.792 ; 159.582,113.792 159.681,113.792 ; 165.85,113.919 167.95,113.919 ; 170.454,113.919 172.454,113.919 ; 179.82,111.633 178.52,111.633 ; 179.83,106.572 178.53,106.572 ; 179.83,108.985 178.53,108.985 ; 179.876,94.727 179.876,97.827 ; 179.876,99.727 179.876,103.027 ; 105.769,52.291 105.007,53.053 105.007,51.529 105.769,52.291 ; 105.769,54.831 105.007,55.593 105.007,54.069 105.769,54.831 ; 105.769,57.371 105.007,56.609 105.007,58.133 105.769,57.371 ; 105.769,59.911 105.007,59.149 105.007,60.673 105.769,59.911 ; 105.769,62.451 105.007,63.213 105.007,61.689 105.769,62.451 ; 126.052,85.527 126.752,85.527 126.052,86.227 126.052,85.527 ; 126.077,97.627 126.977,97.627 126.077,98.527 126.077,97.627 ; 126.077,97.627 128.677,100.227 ; 128.677,100.227 134.977,100.227 134.977,97.027 128.677,97.027 128.677,100.227 ; 154.277,52.727 153.576,52.727 154.277,53.427 154.277,52.727 ; 155.576,57.027 155.576,56.327 154.876,57.027 155.576,57.027 ; 178.52,111.633 178.92,112.033 178.92,111.233 178.52,111.633 ; 178.53,106.572 178.931,106.972 178.931,106.172 178.53,106.572 ; 178.53,108.985 178.931,109.385 178.931,108.585 178.53,108.985
  lines w0.2: 92.317,68.87 92.317,68.163 ; 92.317,71.963 92.317,72.67 ; 92.686,62.429 92.686,61.722 ; 92.686,65.522 92.686,66.229 ; 93.024,68.163 92.317,68.163 ; 93.024,72.67 92.317,72.67 ; 93.393,61.722 92.686,61.722 ; 93.393,66.229 92.686,66.229 ; 98.22,70.666 94.22,70.666 ; 98.54,63.526 94.59,63.526 ; 104.277,69.227 98.677,69.227 98.677,71.227 105.677,71.227 ; 104.382,123.444 107.381,123.444 ; 104.777,68.677 104.227,69.227 104.777,69.777 ; 104.777,70.327 105.677,71.227 ; 104.777,72.127 105.677,71.227 ; 106.482,122.544 107.381,123.444 ; 106.482,124.344 107.381,123.444 ; 127.877,71.927 128.927,71.927 128.927,74.527 ; 134.826,71.227 134.826,73.127 137.226,73.127 137.226,86.727 141.027,86.727 141.027,73.127 143.526,73.127 143.526,71.227 ; 168.876,55.527 170.476,55.527 ; 169.576,54.627 170.476,55.527 ; 169.576,56.427 170.476,55.527 ; 92.317,68.163 93.02,68.866 94.22,68.866 94.22,70.666 ; 92.317,72.67 93.02,71.966 94.22,71.966 94.22,70.666 ; 92.686,61.722 93.39,62.426 94.59,62.426 94.59,63.526 ; 92.686,66.229 93.39,65.526 94.59,65.526 94.59,63.526
  text "GND" at 186.805,135.267 h1.5
  text "BLUETOOTH" at 128.385,132.6 h1.5
  text "5V" at 129.401,130.437 h1
  text "GND" at 131.56,130.437 h1
  text "RX" at 134.608,130.437 h1
  text "TX" at 136.894,130.437 h1
  text "12V" at 187.059,122.44 h1.5
  text "12V" at 155.182,113.292 h1
  text "12V" at 159.882,113.292 h1
  text "GND" at 163.056,113.292 h1
  text "GND" at 172.708,113.292 h1
  text "VSS" at 178.677,112.911 h1
  text "STEPPER IDLE / DRV8825" at 108.065,112.022 h1
  text "D21" at 181.59,110.617 h1 r90
  text "A10" at 181.59,107.823 h1 r90
  text "A9" at 181.59,105.537 h1 r90
  text "ALIGN" at 155.055,103.894 h1
  text "5V" at 180.376,103.427 h1 r90
  text "IGNITION / CHANNEL" at 117.463,93.103 h1.5
  text "5V" at 180.376,92.727 h1 r90
  text "1" at 128.577,84.027 h1 r180
  text "12V" at 137.529,83.957 h1.25
  text "2" at 128.577,81.477 h1 r180
  text "3" at 128.577,79.027 h1 r180
  text "Prog" at 143.48,77.252 h1.5 r83
  text "4" at 128.87,76.432 h1 r144
  text "RESET CONTROL" at 158.23,75.448 h1.25
  text "5V" at 137.91,73.672 h1.5
  text "ALIGN" at 99.175,71.003 h1.25
  text "IGNITER" at 135.37,70.497 h1.5
  text "PRIMARY" at 155.576,65.227 h1
  text "DIRECT/TSC" at 163.428,55.135 h1 r92
  text "INJECTOR / CHANNEL" at 95.357,54.737 h1 r90
  text "ALIGN" at 168.376,53.527 h1 r90
  text "PULL / -UP" at 153.177,52.627 h1 r90
  text "TRIGGER SETUP" at 150.853,48.514 h1.25 r90
  text "DIRECT/TSC" at 163.555,44.975 h1 r92
  text "SECONDARY" at 154.677,42.727 h1
  text "Speeduino Levin Edition v0.4.4d" at 77.331,41.021 h1.8 r1
  text "© Josh Stewart  & Amir Salehzadeh & Bahram Azimbeyk" at 77.077,38.989 h1.8
Bottom Overlay:
  text "SEVER ASSOCIATED / JUMPER WHEN USING / PROTO CONNECTOR LINK" at 106.533,92.964 h1 r90
  text "PROTO / CONNECTOR / LINK" at 93.574,77.343 h1.5 r90
  text "FLEX" at 124.077,63.527 h1
  text "FAN" at 123.277,60.927 h1
  text "FUEL PUMP" at 128.077,58.327 h1
  text "TACHO" at 124.877,55.727 h1
  text "LAUNCH" at 125.677,53.127 h1
Top Solder:
  region net BOOST: 70.981,132.969 82.157,132.969 82.157,125.349 70.981,125.349
  region net BOOST: 70.981,121.92 82.157,121.92 82.157,114.3 70.981,114.3
  region net BOOST: 70.981,110.998 82.157,110.998 82.157,103.378 70.981,103.378
  region net BOOST: 70.981,100.076 82.157,100.076 82.157,92.456 70.981,92.456
  region net BOOST: 70.981,88.9 82.157,88.9 82.157,81.28 70.981,81.28
  region net BOOST: 70.981,77.851 82.157,77.851 82.157,70.231 70.981,70.231
  region net BOOST: 70.981,67.056 82.157,67.056 82.157,59.436 70.981,59.436
  region net BOOST: 70.981,56.007 82.157,56.007 82.157,48.387 70.981,48.387

## Text inside footprints (layer, text, board x,y; h text height)
AAAA1: Top Overlay "IN" at 184.077,134.044 h1.78; Top Overlay "OUT" at 143.818,135.733 h1.78 r270
C1: Document "C20" at 126.346,105.837 h0.5 r270
C2: Document "C20" at 124.367,105.461 h0.5 r90
C3: Document "C20" at 120.215,43.743 h0.5
C4: Document "C20" at 144.656,66.595 h0.5 r180
C5: Document "C20" at 124.279,58.221 h0.5
C6: Document "C20" at 132.991,43.565 h0.5
C7: Document "C20" at 150.568,66.095 h0.5
C8: Document "C20" at 134.191,53.082 h0.5 r180
C9: Document "C20" at 120.088,48.188 h0.5
C10: Document "C20" at 120.088,45.902 h0.5
C11: Document "C20" at 119.961,50.347 h0.5
C12: Document "C20" at 132.991,48.137 h0.5
C13: Document "C20" at 132.991,46.105 h0.5
C14: Document "C20" at 132.991,50.296 h0.5
C15: Document "C20" at 173.143,63.77 h0.5 r270
C16: Document "C20" at 175.048,63.77 h0.5 r270
C17: Document "C20" at 156.543,76.704 h0.5 r180
C22: Document "C20" at 167.301,65.929 h0.5 r270
C23: Document "C20" at 165.269,65.929 h0.5 r270
C24: Document "C20" at 131.01,79.43 h0.5
C25: Document "C20" at 135.639,79.93 h0.5 r180
C26: Document "C20" at 130.629,87.812 h0.5
C27: Document "C20" at 135.131,88.312 h0.5 r180
C28: Document "C20" at 176.64,86.014 h0.5 r90
C29: Document "C20" at 132.992,54.741 h0.5
F2: Document "F1" at 130.302,59.241 h1
J1: Document "J7" at 176.399,99.352 h1 r270
J6: Document "J7" at 169.824,112.641 h1 r180
Q4: Document "Q3" at 69.589,84.333 h1 r90
Q5: Document "Q3" at 69.83,51.562 h1 r90
Q6: Document "Q3" at 69.589,62.235 h1 r90
Q7: Document "Q3" at 69.589,73.411 h1 r90
Q8: Document "Q3" at 69.589,95.382 h1 r90
Q9: Document "Q3" at 69.589,106.431 h1 r90
Q10: Document "Q3" at 69.589,128.529 h1 r90
Q11: Document "Q3" at 69.589,117.48 h1 r90
R1: Document "R20" at 116.608,131.322 h0.5
R2: Document "R20" at 117.809,133.854 h0.5 r180
R3: Document "R20" at 158.772,85.094 h0.5
R4: Document "R20" at 160.1,82.038 h0.5 r180
R5: Document "R20" at 112.417,131.322 h0.5
R6: Document "R20" at 112.417,133.354 h0.5
R7: Document "R20" at 142.278,82.605 h0.5
R8: Document "R20" at 142.313,84.383 h0.5
R9: Document "R20" at 96.219,95.627 h0.5 r180
R10: Document "R20" at 96,85.594 h0.5 r180
R11: Document "R20" at 122.374,80.7 h0.5
R12: Document "R20" at 122.247,83.24 h0.5
R13: Document "R28" at 117.823,80.677 h0.8
R14: Document "R28" at 117.823,83.217 h0.8
R15: Document "R20" at 116.659,127.182 h0.5
R16: Document "R20" at 117.86,129.714 h0.5 r180
R17: Document "R20" at 112.468,127.182 h0.5
R18: Document "R20" at 112.468,129.214 h0.5
R19: Document "R20" at 166.265,81.538 h0.5
R21: Document "R20" at 142.313,73.842 h0.5
R22: Document "R20" at 142.186,76.001 h0.5
R23: Document "R20" at 96.219,91.69 h0.5 r180
R24: Document "R20" at 96.219,88.388 h0.5 r180
R25: Document "R20" at 122.501,75.874 h0.5
R26: Document "R20" at 122.374,78.541 h0.5
R27: Document "R28" at 117.696,75.597 h0.8
R29: Document "R20" at 143.456,64.19 h0.5
R30: Document "R20" at 137.448,64.348 h0.5 r90
R31: Document "R20" at 128.02,43.989 h0.5 r180
R32: Document "R20" at 148.213,66.595 h0.5 r180
R33: Document "R20" at 125.48,56.562 h0.5 r180
R34: Document "R20" at 128.02,53.133 h0.5 r180
R35: Document "R20" at 123.339,45.978 h0.5
R36: Document "R20" at 123.39,50.347 h0.5
R37: Document "R20" at 151.172,60.722 h0.5 r270
R38: Document "R20" at 128.02,48.688 h0.5 r180
R39: Document "R20" at 128.02,46.529 h0.5 r180
R40: Document "R20" at 128.02,50.974 h0.5 r180
R41: Document "R20" at 153.704,59.522 h0.5 r90
R42: Document "R20" at 153.78,49.438 h0.5 r90
R43: Document "R20" at 165.866,58.721 h0.5 r180
R44: Document "R20" at 165.612,50.339 h0.5 r180
R46: Document "R20" at 152.892,74.965 h0.5 r90
R47: Document "R20" at 133.638,104.607 h0.5 r90
R48: Document "R20" at 135.797,104.607 h0.5 r90
R49: Document "R20" at 134.222,121.955 h0.5 r90
R50: Document "R20" at 135.628,123.155 h0.5 r270
R51: Document "R20" at 135.67,64.348 h0.5 r90
R52: Document "R20" at 131.576,126.666 h0.5 r180
R53: Document "R20" at 134.878,126.666 h0.5 r180
R54: Document "R20" at 174.07,86.102 h0.5 r180
R55: Document "R20" at 137.926,55.292 h0.5 r180
R56: Document "R20" at 131.606,104.607 h0.5 r90
R57: Document "R20" at 129.447,104.607 h0.5 r90
R60: Document "R20" at 138.032,121.955 h0.5 r90
R61: Document "R20" at 139.438,123.155 h0.5 r270
R62: Document "R20" at 167.429,74.439 h0.5 r270
R63: Document "R20" at 165.77,73.111 h0.5 r90
SW3: Top Overlay "ON" at 157.931,73.152 h0.8 r90; Top Overlay "1" at 160.941,73.787 h0.8 r270
U2: Document "U4" at 132.536,83.969 h1